# Altium PCB INDICATOR RIGHT.PcbDoc
Units mm, origin at the board's own origin, x right, y up, seen from the top; angles counter-clockwise.
Board outline 156.25 x 64.25 mm, 2 copper layers (Top Layer, Bottom Layer); 98 components, 86 nets, 236 pads, 12 vias.
Unrouted connection lines stored in the file: 26.
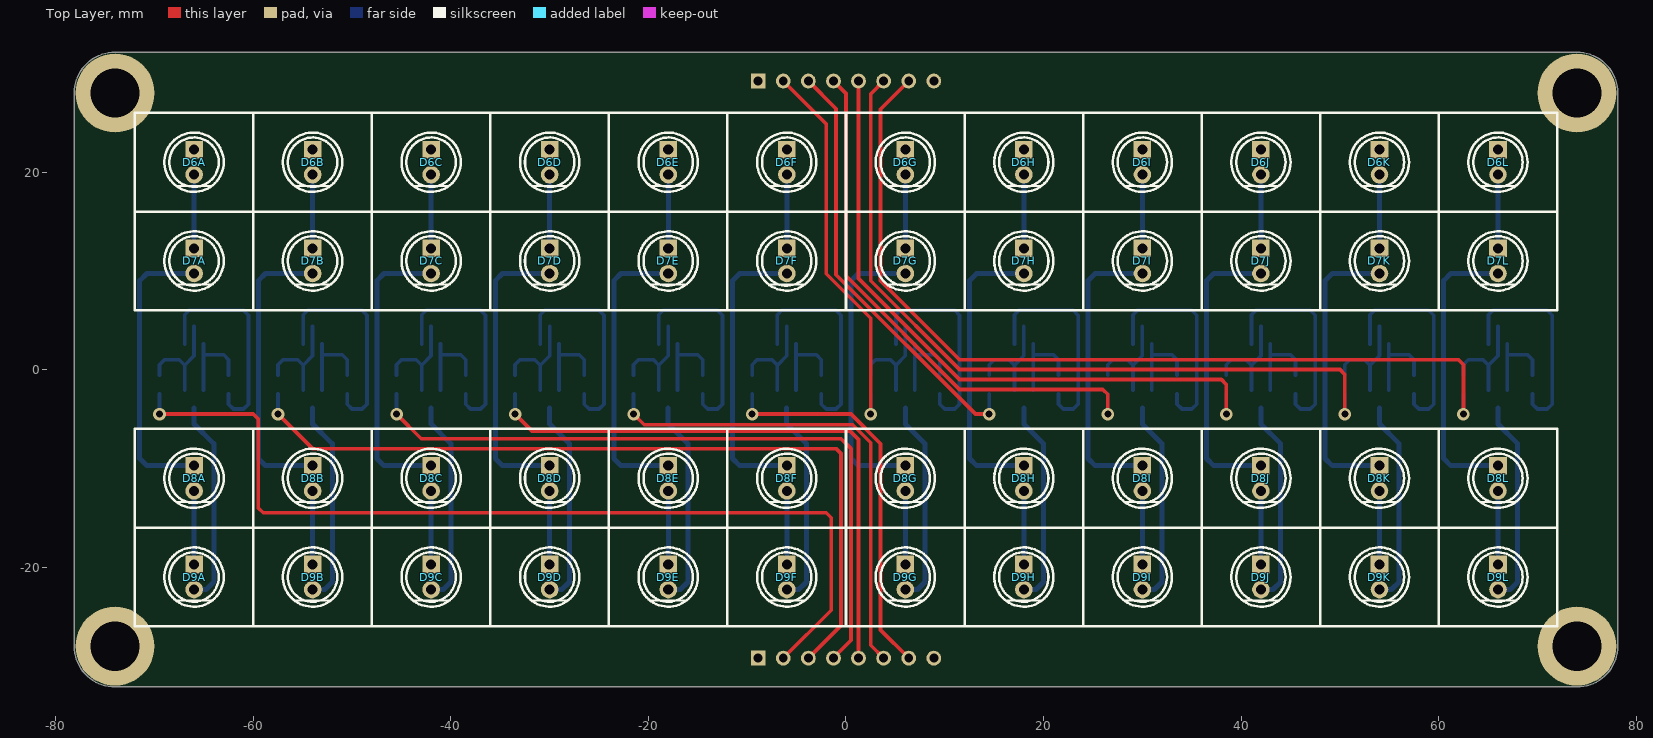
[diagram p0: Top Layer view]
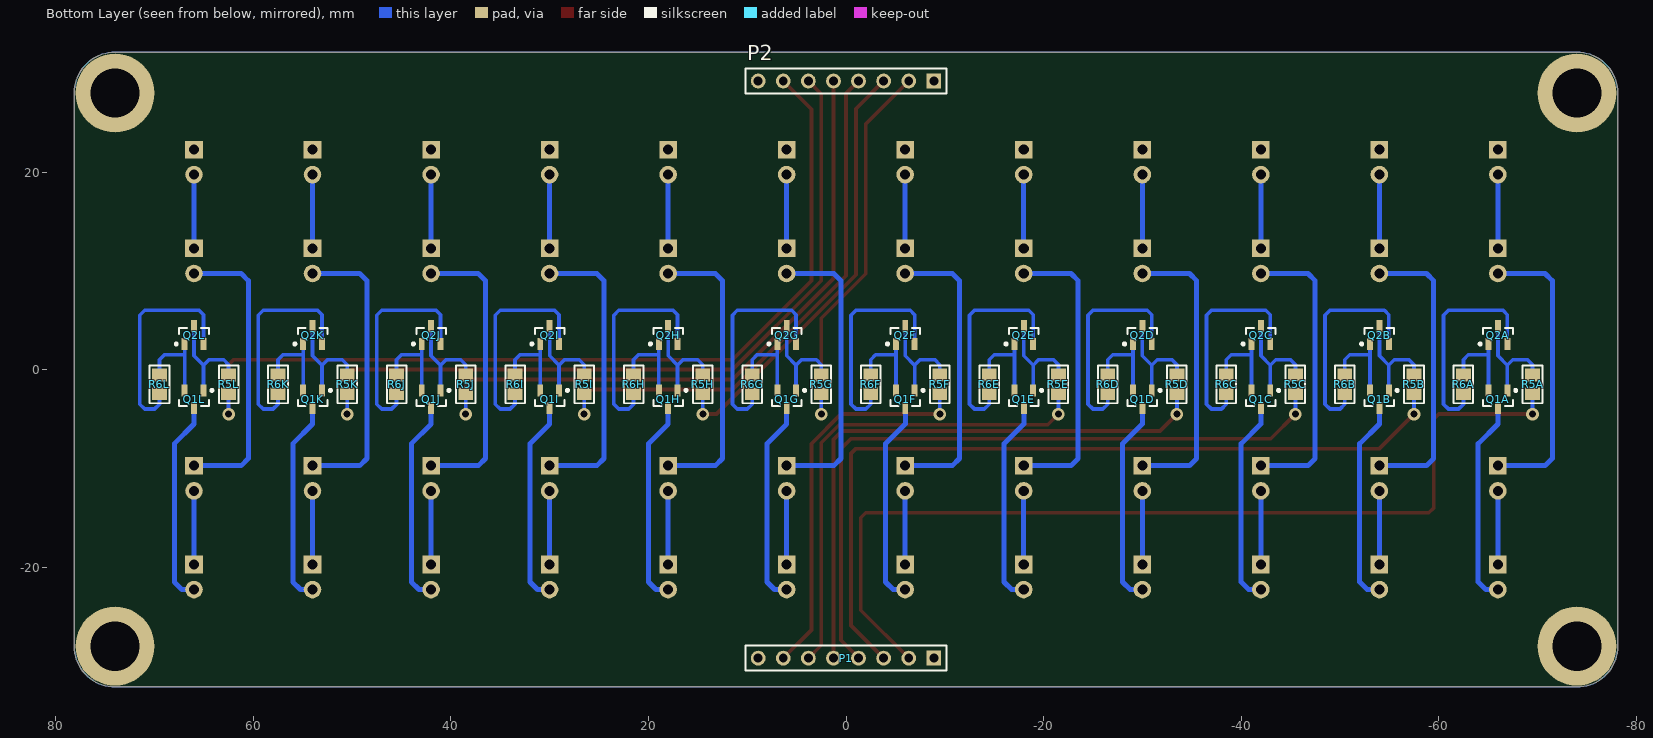
[diagram p1: Bottom Layer view, seen from below]
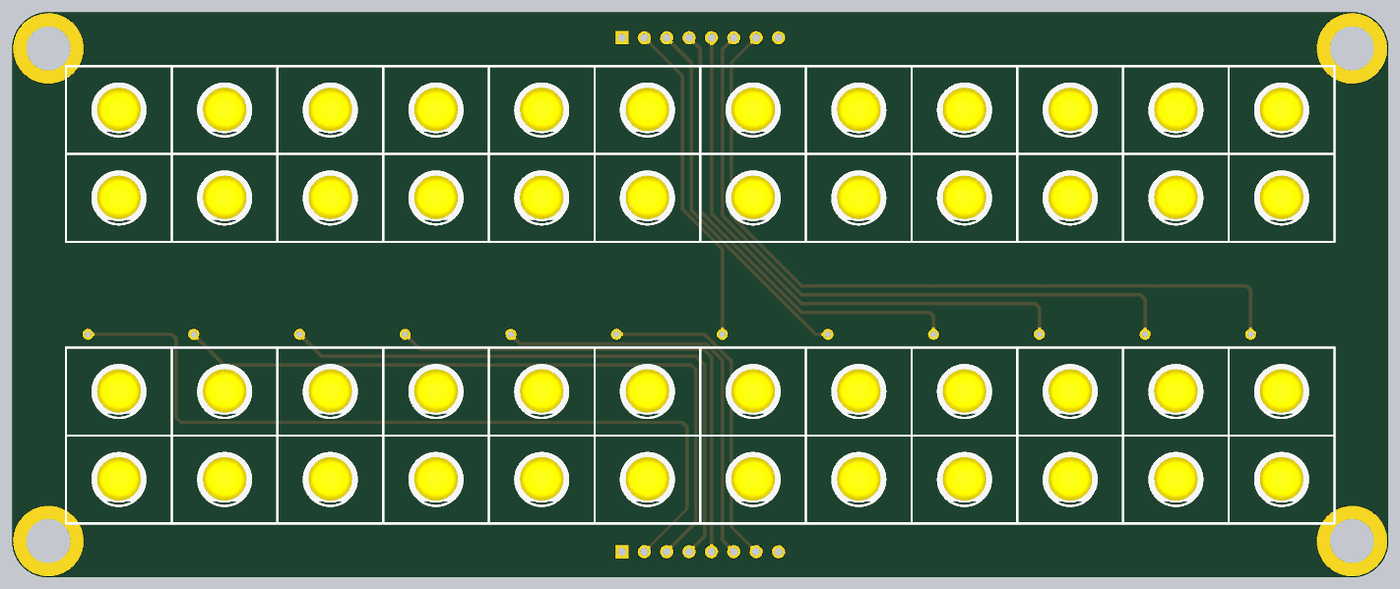
[diagram p2: 3D render of the assembled board from above, using the file's embedded part models]

## Layer stack, top to bottom
Top Layer: signal copper 0.0356
Dielectric: dielectric 0.32, FR-4, Dk 4.8
Bottom Layer: signal copper 0.0356

## Board outline
-78.127,-28 -78.127,28 cw(c-74,28) -74,32.127 74,32.127 cw(c74,28) 78.127,28 78.127,-28 cw(c74,-28) 74,-32.127 -74,-32.127 cw(c-74,-28)

## Design rules (kind name [scope] priority, off if disabled: settings)
Clearance [All] p1: gap=0.254
PolygonConnect [All] p1: connectstyle=Relief reliefconductorwidth=0.254 reliefentries=4 polygonreliefangle="90 Angle" airgapwidth=0.254
RoomDefinition INDICATOR [InComponentClass('INDICATOR')] p1: confinementstyle=ConfineIn formatcopy=TRUE lockcomponents=FALSE outline -78,-32 78,-32 78,32 -78,32
RoomDefinition U_LEDSANDDRIVER12 [InComponentClass('U_LEDSANDDRIVER12')] p2: confinementstyle=ConfineIn formatcopy=TRUE lockcomponents=FALSE outline 60,-26 72,-26 72,26 60,26
RoomDefinition U_LEDSANDDRIVER11 [InComponentClass('U_LEDSANDDRIVER11')] p3: confinementstyle=ConfineIn formatcopy=TRUE lockcomponents=FALSE outline 48,-26 60,-26 60,26 48,26
RoomDefinition U_LEDSANDDRIVER10 [InComponentClass('U_LEDSANDDRIVER10')] p4: confinementstyle=ConfineIn formatcopy=TRUE lockcomponents=FALSE outline 36,-26 48,-26 48,26 36,26
RoomDefinition U_LEDSANDDRIVER9 [InComponentClass('U_LEDSANDDRIVER9')] p5: confinementstyle=ConfineIn formatcopy=TRUE lockcomponents=FALSE outline 24,-26 36,-26 36,26 24,26
RoomDefinition U_LEDSANDDRIVER8 [InComponentClass('U_LEDSANDDRIVER8')] p6: confinementstyle=ConfineIn formatcopy=TRUE lockcomponents=FALSE outline 12,-26 24,-26 24,26 12,26
RoomDefinition U_LEDSANDDRIVER7 [InComponentClass('U_LEDSANDDRIVER7')] p7: confinementstyle=ConfineIn formatcopy=TRUE lockcomponents=FALSE outline 0,-26 12,-26 12,26 0,26
RoomDefinition U_LEDSANDDRIVER6 [InComponentClass('U_LEDSANDDRIVER6')] p8: confinementstyle=ConfineIn formatcopy=TRUE lockcomponents=FALSE outline -12,-26 0,-26 0,26 -12,26
RoomDefinition U_LEDSANDDRIVER5 [InComponentClass('U_LEDSANDDRIVER5')] p9: confinementstyle=ConfineIn formatcopy=TRUE lockcomponents=FALSE outline -24,-26 -12,-26 -12,26 -24,26
RoomDefinition U_LEDSANDDRIVER4 [InComponentClass('U_LEDSANDDRIVER4')] p10: confinementstyle=ConfineIn formatcopy=TRUE lockcomponents=FALSE outline -36,-26 -24,-26 -24,26 -36,26
RoomDefinition U_LEDSANDDRIVER3 [InComponentClass('U_LEDSANDDRIVER3')] p11: confinementstyle=ConfineIn formatcopy=TRUE lockcomponents=FALSE outline -48,-26 -36,-26 -36,26 -48,26
RoomDefinition U_LEDSANDDRIVER2 [InComponentClass('U_LEDSANDDRIVER2')] p12: confinementstyle=ConfineIn formatcopy=TRUE lockcomponents=FALSE outline -60,-26 -48,-26 -48,26 -60,26
RoomDefinition U_LEDSANDDRIVER1 [InComponentClass('U_LEDSANDDRIVER1')] p13: confinementstyle=ConfineIn formatcopy=TRUE lockcomponents=FALSE outline -72,-26 -60,-26 -60,26 -72,26
RoutingVias [All] p1: holewidth=0.8 width=1.6 viastyle="Through Hole" minholewidth=0.711 minwidth=1.27 maxholewidth=5 maxwidth=40
SolderMaskExpansion [All] p1: expansion=0.102
Width [All] p1: maxlimit=2.54 minlimit=0.254 preferedwidth=0.254
28 further rules are at their usual default settings.

## Classes and differential pairs
net class DRIVE[1..16]: DRIVE1 DRIVE2 DRIVE3 DRIVE4 DRIVE5 DRIVE6 DRIVE7 DRIVE8 DRIVE9 DRIVE10 DRIVE11 DRIVE12 DRIVE13 DRIVE14 DRIVE15 DRIVE16
channel class "LEDS AND DRIVER": U_LEDSANDDRIVER1 U_LEDSANDDRIVER2 U_LEDSANDDRIVER3 U_LEDSANDDRIVER4 U_LEDSANDDRIVER5 U_LEDSANDDRIVER6 U_LEDSANDDRIVER7 U_LEDSANDDRIVER8 U_LEDSANDDRIVER9 U_LEDSANDDRIVER10 U_LEDSANDDRIVER11 U_LEDSANDDRIVER12
component class U_LEDSANDDRIVER12: D6L D7L D8L D9L Q1L Q2L R5L R6L
component class U_LEDSANDDRIVER11: D6K D7K D8K D9K Q1K Q2K R5K R6K
component class U_LEDSANDDRIVER10: D6J D7J D8J D9J Q1J Q2J R5J R6J
component class U_LEDSANDDRIVER9: D6I D7I D8I D9I Q1I Q2I R5I R6I
component class U_LEDSANDDRIVER8: D6H D7H D8H D9H Q1H Q2H R5H R6H
component class U_LEDSANDDRIVER7: D6G D7G D8G D9G Q1G Q2G R5G R6G
component class U_LEDSANDDRIVER6: D6F D7F D8F D9F Q1F Q2F R5F R6F
component class U_LEDSANDDRIVER5: D6E D7E D8E D9E Q1E Q2E R5E R6E
component class U_LEDSANDDRIVER4: D6D D7D D8D D9D Q1D Q2D R5D R6D
component class U_LEDSANDDRIVER3: D6C D7C D8C D9C Q1C Q2C R5C R6C
component class U_LEDSANDDRIVER2: D6B D7B D8B D9B Q1B Q2B R5B R6B
component class U_LEDSANDDRIVER1: D6A D7A D8A D9A Q1A Q2A R5A R6A
component class INDICATOR: P1 P2

## Components (designator, comment, footprint, x,y, rotation, side; value= is the part's Value field where it differs from the comment)
D6A "Value" "LED(3D) 5MM VERTICAL (YELLOW)" -66,21 r90 top (schematic designator D6)
D6B "Value" "LED(3D) 5MM VERTICAL (YELLOW)" -54,21 r90 top (schematic designator D6)
D6C "Value" "LED(3D) 5MM VERTICAL (YELLOW)" -42,21 r90 top (schematic designator D6)
D6D "Value" "LED(3D) 5MM VERTICAL (YELLOW)" -30,21 r90 top (schematic designator D6)
D6E "Value" "LED(3D) 5MM VERTICAL (YELLOW)" -18,21 r90 top (schematic designator D6)
D6F "Value" "LED(3D) 5MM VERTICAL (YELLOW)" -6,21 r90 top (schematic designator D6)
D6G "Value" "LED(3D) 5MM VERTICAL (YELLOW)" 6,21 r90 top (schematic designator D6)
D6H "Value" "LED(3D) 5MM VERTICAL (YELLOW)" 18,21 r90 top (schematic designator D6)
D6I "Value" "LED(3D) 5MM VERTICAL (YELLOW)" 30,21 r90 top (schematic designator D6)
D6J "Value" "LED(3D) 5MM VERTICAL (YELLOW)" 42,21 r90 top (schematic designator D6)
D6K "Value" "LED(3D) 5MM VERTICAL (YELLOW)" 54,21 r90 top (schematic designator D6)
D6L "Value" "LED(3D) 5MM VERTICAL (YELLOW)" 66,21 r90 top (schematic designator D6)
D7A "Value" "LED(3D) 5MM VERTICAL (YELLOW)" -66,11 r90 top (schematic designator D7)
D7B "Value" "LED(3D) 5MM VERTICAL (YELLOW)" -54,11 r90 top (schematic designator D7)
D7C "Value" "LED(3D) 5MM VERTICAL (YELLOW)" -42,11 r90 top (schematic designator D7)
D7D "Value" "LED(3D) 5MM VERTICAL (YELLOW)" -30,11 r90 top (schematic designator D7)
D7E "Value" "LED(3D) 5MM VERTICAL (YELLOW)" -18,11 r90 top (schematic designator D7)
D7F "Value" "LED(3D) 5MM VERTICAL (YELLOW)" -6,11 r90 top (schematic designator D7)
D7G "Value" "LED(3D) 5MM VERTICAL (YELLOW)" 6,11 r90 top (schematic designator D7)
D7H "Value" "LED(3D) 5MM VERTICAL (YELLOW)" 18,11 r90 top (schematic designator D7)
D7I "Value" "LED(3D) 5MM VERTICAL (YELLOW)" 30,11 r90 top (schematic designator D7)
D7J "Value" "LED(3D) 5MM VERTICAL (YELLOW)" 42,11 r90 top (schematic designator D7)
D7K "Value" "LED(3D) 5MM VERTICAL (YELLOW)" 54,11 r90 top (schematic designator D7)
D7L "Value" "LED(3D) 5MM VERTICAL (YELLOW)" 66,11 r90 top (schematic designator D7)
D8A "Value" "LED(3D) 5MM VERTICAL (YELLOW)" -66,-11 r90 top (schematic designator D8)
D8B "Value" "LED(3D) 5MM VERTICAL (YELLOW)" -54,-11 r90 top (schematic designator D8)
D8C "Value" "LED(3D) 5MM VERTICAL (YELLOW)" -42,-11 r90 top (schematic designator D8)
D8D "Value" "LED(3D) 5MM VERTICAL (YELLOW)" -30,-11 r90 top (schematic designator D8)
D8E "Value" "LED(3D) 5MM VERTICAL (YELLOW)" -18,-11 r90 top (schematic designator D8)
D8F "Value" "LED(3D) 5MM VERTICAL (YELLOW)" -6,-11 r90 top (schematic designator D8)
D8G "Value" "LED(3D) 5MM VERTICAL (YELLOW)" 6,-11 r90 top (schematic designator D8)
D8H "Value" "LED(3D) 5MM VERTICAL (YELLOW)" 18,-11 r90 top (schematic designator D8)
D8I "Value" "LED(3D) 5MM VERTICAL (YELLOW)" 30,-11 r90 top (schematic designator D8)
D8J "Value" "LED(3D) 5MM VERTICAL (YELLOW)" 42,-11 r90 top (schematic designator D8)
D8K "Value" "LED(3D) 5MM VERTICAL (YELLOW)" 54,-11 r90 top (schematic designator D8)
D8L "Value" "LED(3D) 5MM VERTICAL (YELLOW)" 66,-11 r90 top (schematic designator D8)
D9A "Value" "LED(3D) 5MM VERTICAL (YELLOW)" -66,-21 r90 top (schematic designator D9)
D9B "Value" "LED(3D) 5MM VERTICAL (YELLOW)" -54,-21 r90 top (schematic designator D9)
D9C "Value" "LED(3D) 5MM VERTICAL (YELLOW)" -42,-21 r90 top (schematic designator D9)
D9D "Value" "LED(3D) 5MM VERTICAL (YELLOW)" -30,-21 r90 top (schematic designator D9)
D9E "Value" "LED(3D) 5MM VERTICAL (YELLOW)" -18,-21 r90 top (schematic designator D9)
D9F "Value" "LED(3D) 5MM VERTICAL (YELLOW)" -6,-21 r90 top (schematic designator D9)
D9G "Value" "LED(3D) 5MM VERTICAL (YELLOW)" 6,-21 r90 top (schematic designator D9)
D9H "Value" "LED(3D) 5MM VERTICAL (YELLOW)" 18,-21 r90 top (schematic designator D9)
D9I "Value" "LED(3D) 5MM VERTICAL (YELLOW)" 30,-21 r90 top (schematic designator D9)
D9J "Value" "LED(3D) 5MM VERTICAL (YELLOW)" 42,-21 r90 top (schematic designator D9)
D9K "Value" "LED(3D) 5MM VERTICAL (YELLOW)" 54,-21 r90 top (schematic designator D9)
D9L "Value" "LED(3D) 5MM VERTICAL (YELLOW)" 66,-21 r90 top (schematic designator D9)
P1 "Header 8" HDR1X8 -8.89,-29.21 r0 bottom
P2 "Header 8" HDR1X8 -8.89,29.21 r0 bottom
Q1A "BC817" SOT23-3L -66,-3 r270 bottom (schematic designator Q1)
Q1B "BC817" SOT23-3L -54,-3 r270 bottom (schematic designator Q1)
Q1C "BC817" SOT23-3L -42,-3 r270 bottom (schematic designator Q1)
Q1D "BC817" SOT23-3L -30,-3 r270 bottom (schematic designator Q1)
Q1E "BC817" SOT23-3L -18,-3 r270 bottom (schematic designator Q1)
Q1F "BC817" SOT23-3L -6,-3 r270 bottom (schematic designator Q1)
Q1G "BC817" SOT23-3L 6,-3 r270 bottom (schematic designator Q1)
Q1H "BC817" SOT23-3L 18,-3 r270 bottom (schematic designator Q1)
Q1I "BC817" SOT23-3L 30,-3 r270 bottom (schematic designator Q1)
Q1J "BC817" SOT23-3L 42,-3 r270 bottom (schematic designator Q1)
Q1K "BC817" SOT23-3L 54,-3 r270 bottom (schematic designator Q1)
Q1L "BC817" SOT23-3L 66,-3 r270 bottom (schematic designator Q1)
Q2A "BC817" SOT23-3L -66,3.5 r90 bottom (schematic designator Q2)
Q2B "BC817" SOT23-3L -54,3.5 r90 bottom (schematic designator Q2)
Q2C "BC817" SOT23-3L -42,3.5 r90 bottom (schematic designator Q2)
Q2D "BC817" SOT23-3L -30,3.5 r90 bottom (schematic designator Q2)
Q2E "BC817" SOT23-3L -18,3.5 r90 bottom (schematic designator Q2)
Q2F "BC817" SOT23-3L -6,3.5 r90 bottom (schematic designator Q2)
Q2G "BC817" SOT23-3L 6,3.5 r90 bottom (schematic designator Q2)
Q2H "BC817" SOT23-3L 18,3.5 r90 bottom (schematic designator Q2)
Q2I "BC817" SOT23-3L 30,3.5 r90 bottom (schematic designator Q2)
Q2J "BC817" SOT23-3L 42,3.5 r90 bottom (schematic designator Q2)
Q2K "BC817" SOT23-3L 54,3.5 r90 bottom (schematic designator Q2)
Q2L "BC817" SOT23-3L 66,3.5 r90 bottom (schematic designator Q2)
R5A "1k" "RES (3D) - 0805" -69.5,-1.5 r270 bottom (schematic designator R5)
R5B "1k" "RES (3D) - 0805" -57.5,-1.5 r270 bottom (schematic designator R5)
R5C "1k" "RES (3D) - 0805" -45.5,-1.5 r270 bottom (schematic designator R5)
R5D "1k" "RES (3D) - 0805" -33.5,-1.5 r270 bottom (schematic designator R5)
R5E "1k" "RES (3D) - 0805" -21.5,-1.5 r270 bottom (schematic designator R5)
R5F "1k" "RES (3D) - 0805" -9.5,-1.5 r270 bottom (schematic designator R5)
R5G "1k" "RES (3D) - 0805" 2.5,-1.5 r270 bottom (schematic designator R5)
R5H "1k" "RES (3D) - 0805" 14.5,-1.5 r270 bottom (schematic designator R5)
R5I "1k" "RES (3D) - 0805" 26.5,-1.5 r270 bottom (schematic designator R5)
R5J "1k" "RES (3D) - 0805" 38.5,-1.5 r270 bottom (schematic designator R5)
R5K "1k" "RES (3D) - 0805" 50.5,-1.5 r270 bottom (schematic designator R5)
R5L "1k" "RES (3D) - 0805" 62.5,-1.5 r270 bottom (schematic designator R5)
R6A "35R" "RES (3D) - 0805" -62.5,-1.5 r90 bottom (schematic designator R6)
R6B "35R" "RES (3D) - 0805" -50.5,-1.5 r90 bottom (schematic designator R6)
R6C "35R" "RES (3D) - 0805" -38.5,-1.5 r90 bottom (schematic designator R6)
R6D "35R" "RES (3D) - 0805" -26.5,-1.5 r90 bottom (schematic designator R6)
R6E "35R" "RES (3D) - 0805" -14.5,-1.5 r90 bottom (schematic designator R6)
R6F "35R" "RES (3D) - 0805" -2.5,-1.5 r90 bottom (schematic designator R6)
R6G "35R" "RES (3D) - 0805" 9.5,-1.5 r90 bottom (schematic designator R6)
R6H "35R" "RES (3D) - 0805" 21.5,-1.5 r90 bottom (schematic designator R6)
R6I "35R" "RES (3D) - 0805" 33.5,-1.5 r90 bottom (schematic designator R6)
R6J "35R" "RES (3D) - 0805" 45.5,-1.5 r90 bottom (schematic designator R6)
R6K "35R" "RES (3D) - 0805" 57.5,-1.5 r90 bottom (schematic designator R6)
R6L "35R" "RES (3D) - 0805" 69.5,-1.5 r90 bottom (schematic designator R6)

## Footprints (in the part's own frame and the unit in brackets; to place one, negate y for a bottom-side part, rotate by r counter-clockwise, add the part's x,y. Pads: shape width x height; smd on the part's side, far side on the other; paste and mask are expansions set on the pad)
HDR1X8 [mm] "Connector; Header; 8 Position"
  rect 1.5x1.5 hole 0.9: 1(0,0)
  round 1.5 hole 0.9: 2(2.54,0) 3(5.08,0) 4(7.62,0) 5(10.16,0) 6(12.7,0) 7(15.24,0) 8(17.78,0)
  silkscreen extent -1.27,-1.27 19.05,1.27
"LED(3D) 5MM VERTICAL (YELLOW)" [mil]
  rect 70x70 hole 40: 1(50.06,-0.28)
  round 70 hole 40: 2(-49.94,-0.28)
  silkscreen extent -95,-118 118,118, body extent -96,-119 117,118, height 485
"RES (3D) - 0805" [mm]
  rect 1.3x1.5 smd: 1(-0.95,0) 2(0.95,0)
  silkscreen extent -1.91,-0.99 1.91,0.99, body extent -1,-0.63 1,0.63, height 1
SOT23-3L [mm] "SOT23, 3-Leads, Body 2.9x1.3mm, Pitch 0.95mm, Lead Span 2.5mm, IPC High Density"
  rect 1.2x0.6 smd: 1(-0.9,0.95) 2(-0.9,-0.95) 3(0.9,0)
  silkscreen extent -1.02,-1.5 0.7,1.92, body extent -1.25,-1.5 1.25,1.5, height 1.12

## Part data
D6A D6B D6C D6D D6E D6F D6G D6H D6I D6J D6K D6L D7A D7B D7C D7D D7E D7F D7G D7H D7I D7J D7K D7L D8A D8B D8C D8D D8E D8F D8G D8H D8I D8J D8K D8L D9A D9B D9C D9D D9E D9F D9G D9H D9I D9J D9K D9L: library part "LED 3mm RED", "LED 55"
P1 P2: "Header, 8-Pin"
Q1A Q1B Q1C Q1D Q1E Q1F Q1G Q1H Q1I Q1J Q1K Q1L Q2A Q2B Q2C Q2D Q2E Q2F Q2G Q2H Q2I Q2J Q2K Q2L: "NPN Bipolar Transistor"
R5A R5B R5C R5D R5E R5F R5G R5H R5I R5J R5K R5L R6A R6B R6C R6D R6E R6F R6G R6H R6I R6J R6K R6L: library part "RES SMD 0603 1k", "RESISTOR SMD 0603 1k"

## Free pads (board coordinates)
  round 8 hole 5: 0(-74,-28) 0(-74,28) 0(74,-28) 0(74,28)

## Via types
v1: diameter 1.27, hole 0.711, Top Layer to Bottom Layer, 12 vias

## Nets (pads, with @x,y where several pads share a name; then routed paths per layer and width w, separated by ;. In a path a pad name is that pad's centre, name@x,y a point inside that pad or via, vN(x,y) a via of type N, cw(c..) or ccw(c..) an arc to the next point about the centre after c; other vN are vias at no path point)
DRIVE1: P1.2 R5A.2 | length 95.9
  Top Layer w0.381: v1(-69.5,-4.5) -60,-4.5 -59.5,-5 -59.5,-14 -59,-14.5 -2,-14.5 -1.5,-15 -1.5,-24.36 P1.2
  Bottom Layer w0.381: v1(-69.5,-4.5) R5A.2
DRIVE2: P1.3 R5B.2 | length 82.8
  Top Layer w0.381: v1(-57.5,-4.5) -54,-8 -1,-8 -0.5,-8.5 -0.5,-25.9 P1.3
  Bottom Layer w0.381: v1(-57.5,-4.5) R5B.2
DRIVE3: P1.4 R5C.2 | length 71.4
  Top Layer w0.381: v1(-45.5,-4.5) -43,-7 -0.5,-7 0.5,-8 0.5,-27.4 -1.27,-29.17 P1.4
  Bottom Layer w0.381: v1(-45.5,-4.5) R5C.2
DRIVE4: P1.5 R5D.2 | length 60
  Top Layer w0.381: v1(-33.5,-4.5) -31.786,-6.215 0.415,-6.215 1.27,-7.07 P1.5
  Bottom Layer w0.381: v1(-33.5,-4.5) R5D.2
DRIVE5: P1.6 R5E.2 | length 49.6
  Top Layer w0.381: v1(-21.5,-4.5) -20.421,-5.58 0.681,-5.58 2.5,-7.398 2.5,-27.9 P1.6
  Bottom Layer w0.381: v1(-21.5,-4.5) R5E.2
DRIVE6: P1.7 R5F.2 | length 39.2
  Top Layer w0.381: v1(-9.5,-4.5) 0.5,-4.5 3.5,-7.5 3.5,-26.36 P1.7
  Bottom Layer w0.381: v1(-9.5,-4.5) R5F.2
DRIVE7: P2.2 R5G.2 | length 39.4
  Top Layer w0.381: P2.2 -2,24.86 -2,9.704 2.5,5.204 v1(2.5,-4.5)
  Bottom Layer w0.381: v1(2.5,-4.5) R5G.2
DRIVE8: P2.3 R5H.2 | length 44.2
  Top Layer w0.381: P2.3 -1,26.4 -1,9.602 13.102,-4.5 v1(14.5,-4.5)
  Bottom Layer w0.381: v1(14.5,-4.5) R5H.2
DRIVE9: P2.4 R5I.2 | length 55.8
  Top Layer w0.381: P2.4 0,27.94 0,9.5 11.5,-2 26,-2 26.5,-2.5 v1(26.5,-4.5)
  Bottom Layer w0.381: v1(26.5,-4.5) R5I.2
DRIVE10: P2.5 R5J.2 | length 66.7
  Top Layer w0.381: P2.5 1.27,9.23 11.5,-1 38,-1 38.5,-1.5 v1(38.5,-4.5)
  Bottom Layer w0.381: v1(38.5,-4.5) R5J.2
DRIVE11: P2.6 R5K.2 | length 78.7
  Top Layer w0.381: P2.6 2.5,27.9 2.5,9 11.5,0 50,0 50.5,-0.5 v1(50.5,-4.5)
  Bottom Layer w0.381: v1(50.5,-4.5) R5K.2
DRIVE12: P2.7 R5L.2 | length 91
  Top Layer w0.381: P2.7 3.5,26.36 3.5,9 11.5,1 62,1 62.5,0.5 v1(62.5,-4.5)
  Bottom Layer w0.381: v1(62.5,-4.5) R5L.2
GND: P1.8 P2.8 Q2A.2 Q2B.2 Q2C.2 Q2D.2 Q2E.2 Q2F.2 Q2G.2 Q2H.2 Q2I.2 Q2J.2 Q2K.2 Q2L.2 R6A.1 R6B.1 R6C.1 R6D.1 R6E.1 R6F.1 R6G.1 R6H.1 R6I.1 R6J.1 R6K.1 R6L.1 | length 267.1
  Bottom Layer w0.381: Q2A.2 -66.95,5.55 -66.5,6 -61,6 -60.5,5.5 -60.5,-3.5 -61,-4 -62,-4 -62.5,-3.5 R6A.1 ; Q2B.2 -54.95,5.55 -54.5,6 -49,6 -48.5,5.5 -48.5,-3.5 -49,-4 -50,-4 -50.5,-3.5 R6B.1 ; Q2C.2 -42.95,5.55 -42.5,6 -37,6 -36.5,5.5 -36.5,-3.5 -37,-4 -38,-4 -38.5,-3.5 R6C.1 ; Q2D.2 -30.95,5.55 -30.5,6 -25,6 -24.5,5.5 -24.5,-3.5 -25,-4 -26,-4 -26.5,-3.5 R6D.1 ; Q2E.2 -18.95,5.55 -18.5,6 -13,6 -12.5,5.5 -12.5,-3.5 -13,-4 -14,-4 -14.5,-3.5 R6E.1 ; Q2F.2 -6.95,5.55 -6.5,6 -1,6 -0.5,5.5 -0.5,-3.5 -1,-4 -2,-4 -2.5,-3.5 R6F.1 ; Q2G.2 5.05,5.55 5.5,6 11,6 11.5,5.5 11.5,-3.5 11,-4 10,-4 9.5,-3.5 R6G.1 ; Q2H.2 17.05,5.55 17.5,6 23,6 23.5,5.5 23.5,-3.5 23,-4 22,-4 21.5,-3.5 R6H.1 ; Q2I.2 29.05,5.55 29.5,6 35,6 35.5,5.5 35.5,-3.5 35,-4 34,-4 33.5,-3.5 R6I.1 ; Q2J.2 41.05,5.55 41.5,6 47,6 47.5,5.5 47.5,-3.5 47,-4 46,-4 45.5,-3.5 R6J.1 ; Q2K.2 53.05,5.55 53.5,6 59,6 59.5,5.5 59.5,-3.5 59,-4 58,-4 57.5,-3.5 R6K.1 ; Q2L.2 65.05,5.55 65.5,6 71,6 71.5,5.5 71.5,-3.5 71,-4 70,-4 69.5,-3.5 R6L.1
NetD6A_2: D6A.2 D7A.1 | length 7.5
  Bottom Layer w0.508: D7A.1 D6A.2
NetD6B_2: D6B.2 D7B.1 | length 7.5
  Bottom Layer w0.508: D7B.1 D6B.2
NetD6C_2: D6C.2 D7C.1 | length 7.5
  Bottom Layer w0.508: D7C.1 D6C.2
NetD6D_2: D6D.2 D7D.1 | length 7.5
  Bottom Layer w0.508: D7D.1 D6D.2
NetD6E_2: D6E.2 D7E.1 | length 7.5
  Bottom Layer w0.508: D7E.1 D6E.2
NetD6F_2: D6F.2 D7F.1 | length 7.5
  Bottom Layer w0.508: D7F.1 D6F.2
NetD6G_2: D6G.2 D7G.1 | length 7.5
  Bottom Layer w0.508: D7G.1 D6G.2
NetD6H_2: D6H.2 D7H.1 | length 7.5
  Bottom Layer w0.508: D7H.1 D6H.2
NetD6I_2: D6I.2 D7I.1 | length 7.5
  Bottom Layer w0.508: D7I.1 D6I.2
NetD6J_2: D6J.2 D7J.1 | length 7.5
  Bottom Layer w0.508: D7J.1 D6J.2
NetD6K_2: D6K.2 D7K.1 | length 7.5
  Bottom Layer w0.508: D7K.1 D6K.2
NetD6L_2: D6L.2 D7L.1 | length 7.5
  Bottom Layer w0.508: D7L.1 D6L.2
NetD7A_2: D7A.2 D8A.1 | length 29.6
  Bottom Layer w0.508: D8A.1 -70.772,-9.728 -71.5,-9 -71.5,9 -70.768,9.732 D7A.2
NetD7B_2: D7B.2 D8B.1 | length 29.6
  Bottom Layer w0.508: D8B.1 -58.772,-9.728 -59.5,-9 -59.5,9 -58.768,9.732 D7B.2
NetD7C_2: D7C.2 D8C.1 | length 29.6
  Bottom Layer w0.508: D8C.1 -46.772,-9.728 -47.5,-9 -47.5,9 -46.768,9.732 D7C.2
NetD7D_2: D7D.2 D8D.1 | length 29.6
  Bottom Layer w0.508: D8D.1 -34.772,-9.728 -35.5,-9 -35.5,9 -34.768,9.732 D7D.2
NetD7E_2: D7E.2 D8E.1 | length 29.6
  Bottom Layer w0.508: D8E.1 -22.772,-9.728 -23.5,-9 -23.5,9 -22.768,9.732 D7E.2
NetD7F_2: D7F.2 D8F.1 | length 29.6
  Bottom Layer w0.508: D8F.1 -10.772,-9.728 -11.5,-9 -11.5,9 -10.768,9.732 D7F.2
NetD7G_2: D7G.2 D8G.1 | length 29.6
  Bottom Layer w0.508: D8G.1 1.228,-9.728 0.5,-9 0.5,9 1.232,9.732 D7G.2
NetD7H_2: D7H.2 D8H.1 | length 29.6
  Bottom Layer w0.508: D8H.1 13.228,-9.728 12.5,-9 12.5,9 13.232,9.732 D7H.2
NetD7I_2: D7I.2 D8I.1 | length 29.6
  Bottom Layer w0.508: D8I.1 25.228,-9.728 24.5,-9 24.5,9 25.232,9.732 D7I.2
NetD7J_2: D7J.2 D8J.1 | length 29.6
  Bottom Layer w0.508: D8J.1 37.228,-9.728 36.5,-9 36.5,9 37.232,9.732 D7J.2
NetD7K_2: D7K.2 D8K.1 | length 29.6
  Bottom Layer w0.508: D8K.1 49.228,-9.728 48.5,-9 48.5,9 49.232,9.732 D7K.2
NetD7L_2: D7L.2 D8L.1 | length 29.6
  Bottom Layer w0.508: D8L.1 61.228,-9.728 60.5,-9 60.5,9 61.232,9.732 D7L.2
NetD8A_2: D8A.2 D9A.1 | length 7.5
  Bottom Layer w0.508: D9A.1 D8A.2
NetD8B_2: D8B.2 D9B.1 | length 7.5
  Bottom Layer w0.508: D9B.1 D8B.2
NetD8C_2: D8C.2 D9C.1 | length 7.5
  Bottom Layer w0.508: D9C.1 D8C.2
NetD8D_2: D8D.2 D9D.1 | length 7.5
  Bottom Layer w0.508: D9D.1 D8D.2
NetD8E_2: D8E.2 D9E.1 | length 7.5
  Bottom Layer w0.508: D9E.1 D8E.2
NetD8F_2: D8F.2 D9F.1 | length 7.5
  Bottom Layer w0.508: D9F.1 D8F.2
NetD8G_2: D8G.2 D9G.1 | length 7.5
  Bottom Layer w0.508: D9G.1 D8G.2
NetD8H_2: D8H.2 D9H.1 | length 7.5
  Bottom Layer w0.508: D9H.1 D8H.2
NetD8I_2: D8I.2 D9I.1 | length 7.5
  Bottom Layer w0.508: D9I.1 D8I.2
NetD8J_2: D8J.2 D9J.1 | length 7.5
  Bottom Layer w0.508: D9J.1 D8J.2
NetD8K_2: D8K.2 D9K.1 | length 7.5
  Bottom Layer w0.508: D9K.1 D8K.2
NetD8L_2: D8L.2 D9L.1 | length 7.5
  Bottom Layer w0.508: D9L.1 D8L.2
NetD9A_2: D9A.2 Q1A.3 | length 20.7
  Bottom Layer w0.508: Q1A.3 -66,-5.5 -64,-7.5 -64,-21.5 -64.768,-22.268 D9A.2
NetD9B_2: D9B.2 Q1B.3 | length 20.7
  Bottom Layer w0.508: Q1B.3 -54,-5.5 -52,-7.5 -52,-21.5 -52.768,-22.268 D9B.2
NetD9C_2: D9C.2 Q1C.3 | length 20.7
  Bottom Layer w0.508: Q1C.3 -42,-5.5 -40,-7.5 -40,-21.5 -40.768,-22.268 D9C.2
NetD9D_2: D9D.2 Q1D.3 | length 20.7
  Bottom Layer w0.508: Q1D.3 -30,-5.5 -28,-7.5 -28,-21.5 -28.768,-22.268 D9D.2
NetD9E_2: D9E.2 Q1E.3 | length 20.7
  Bottom Layer w0.508: Q1E.3 -18,-5.5 -16,-7.5 -16,-21.5 -16.768,-22.268 D9E.2
NetD9F_2: D9F.2 Q1F.3 | length 20.7
  Bottom Layer w0.508: Q1F.3 -6,-5.5 -4,-7.5 -4,-21.5 -4.768,-22.268 D9F.2
NetD9G_2: D9G.2 Q1G.3 | length 20.7
  Bottom Layer w0.508: Q1G.3 6,-5.5 8,-7.5 8,-21.5 7.232,-22.268 D9G.2
NetD9H_2: D9H.2 Q1H.3 | length 20.7
  Bottom Layer w0.508: Q1H.3 18,-5.5 20,-7.5 20,-21.5 19.232,-22.268 D9H.2
NetD9I_2: D9I.2 Q1I.3 | length 20.7
  Bottom Layer w0.508: Q1I.3 30,-5.5 32,-7.5 32,-21.5 31.232,-22.268 D9I.2
NetD9J_2: D9J.2 Q1J.3 | length 20.7
  Bottom Layer w0.508: Q1J.3 42,-5.5 44,-7.5 44,-21.5 43.232,-22.268 D9J.2
NetD9K_2: D9K.2 Q1K.3 | length 20.7
  Bottom Layer w0.508: Q1K.3 54,-5.5 56,-7.5 56,-21.5 55.232,-22.268 D9K.2
NetD9L_2: D9L.2 Q1L.3 | length 20.7
  Bottom Layer w0.508: Q1L.3 66,-5.5 68,-7.5 68,-21.5 67.232,-22.268 D9L.2
NetQ1A_1: Q1A.1 Q2A.3 R5A.1 | length 10.9
  Bottom Layer w0.381: R5A.1 -69.5,0.5 -69,1 -67.5,1 -66.95,0.45 ; Q1A.1 -66.95,0.45 ; Q2A.3 -66,1.4 -66.95,0.45
NetQ1A_2: Q1A.2 Q2A.1 R6A.2 | length 9
  Bottom Layer w0.381: Q1A.2 -65.05,1.5 ; Q2A.1 -65.05,1.5 ; R6A.2 -62.5,1 -63,1.5 -65.05,1.5
NetQ1B_1: Q1B.1 Q2B.3 R5B.1 | length 10.9
  Bottom Layer w0.381: R5B.1 -57.5,0.5 -57,1 -55.5,1 -54.95,0.45 ; Q1B.1 -54.95,0.45 ; Q2B.3 -54,1.4 -54.95,0.45
NetQ1B_2: Q1B.2 Q2B.1 R6B.2 | length 9
  Bottom Layer w0.381: Q1B.2 -53.05,1.5 ; Q2B.1 -53.05,1.5 ; R6B.2 -50.5,1 -51,1.5 -53.05,1.5
NetQ1C_1: Q1C.1 Q2C.3 R5C.1 | length 10.9
  Bottom Layer w0.381: R5C.1 -45.5,0.5 -45,1 -43.5,1 -42.95,0.45 ; Q1C.1 -42.95,0.45 ; Q2C.3 -42,1.4 -42.95,0.45
NetQ1C_2: Q1C.2 Q2C.1 R6C.2 | length 9
  Bottom Layer w0.381: Q1C.2 -41.05,1.5 ; Q2C.1 -41.05,1.5 ; R6C.2 -38.5,1 -39,1.5 -41.05,1.5
NetQ1D_1: Q1D.1 Q2D.3 R5D.1 | length 10.9
  Bottom Layer w0.381: R5D.1 -33.5,0.5 -33,1 -31.5,1 -30.95,0.45 ; Q1D.1 -30.95,0.45 ; Q2D.3 -30,1.4 -30.95,0.45
NetQ1D_2: Q1D.2 Q2D.1 R6D.2 | length 9
  Bottom Layer w0.381: Q1D.2 -29.05,1.5 ; Q2D.1 -29.05,1.5 ; R6D.2 -26.5,1 -27,1.5 -29.05,1.5
NetQ1E_1: Q1E.1 Q2E.3 R5E.1 | length 10.9
  Bottom Layer w0.381: R5E.1 -21.5,0.5 -21,1 -19.5,1 -18.95,0.45 ; Q1E.1 -18.95,0.45 ; Q2E.3 -18,1.4 -18.95,0.45
NetQ1E_2: Q1E.2 Q2E.1 R6E.2 | length 9
  Bottom Layer w0.381: Q1E.2 -17.05,1.5 ; Q2E.1 -17.05,1.5 ; R6E.2 -14.5,1 -15,1.5 -17.05,1.5
NetQ1F_1: Q1F.1 Q2F.3 R5F.1 | length 10.9
  Bottom Layer w0.381: R5F.1 -9.5,0.5 -9,1 -7.5,1 -6.95,0.45 ; Q1F.1 -6.95,0.45 ; Q2F.3 -6,1.4 -6.95,0.45
NetQ1F_2: Q1F.2 Q2F.1 R6F.2 | length 9
  Bottom Layer w0.381: Q1F.2 -5.05,1.5 ; Q2F.1 -5.05,1.5 ; R6F.2 -2.5,1 -3,1.5 -5.05,1.5
NetQ1G_1: Q1G.1 Q2G.3 R5G.1 | length 10.9
  Bottom Layer w0.381: R5G.1 2.5,0.5 3,1 4.5,1 5.05,0.45 ; Q1G.1 5.05,0.45 ; Q2G.3 6,1.4 5.05,0.45
NetQ1G_2: Q1G.2 Q2G.1 R6G.2 | length 9
  Bottom Layer w0.381: Q1G.2 6.95,1.5 ; Q2G.1 6.95,1.5 ; R6G.2 9.5,1 9,1.5 6.95,1.5
NetQ1H_1: Q1H.1 Q2H.3 R5H.1 | length 10.9
  Bottom Layer w0.381: R5H.1 14.5,0.5 15,1 16.5,1 17.05,0.45 ; Q1H.1 17.05,0.45 ; Q2H.3 18,1.4 17.05,0.45
NetQ1H_2: Q1H.2 Q2H.1 R6H.2 | length 9
  Bottom Layer w0.381: Q1H.2 18.95,1.5 ; Q2H.1 18.95,1.5 ; R6H.2 21.5,1 21,1.5 18.95,1.5
NetQ1I_1: Q1I.1 Q2I.3 R5I.1 | length 10.9
  Bottom Layer w0.381: R5I.1 26.5,0.5 27,1 28.5,1 29.05,0.45 ; Q1I.1 29.05,0.45 ; Q2I.3 30,1.4 29.05,0.45
NetQ1I_2: Q1I.2 Q2I.1 R6I.2 | length 9
  Bottom Layer w0.381: Q1I.2 30.95,1.5 ; Q2I.1 30.95,1.5 ; R6I.2 33.5,1 33,1.5 30.95,1.5
NetQ1J_1: Q1J.1 Q2J.3 R5J.1 | length 10.9
  Bottom Layer w0.381: R5J.1 38.5,0.5 39,1 40.5,1 41.05,0.45 ; Q1J.1 41.05,0.45 ; Q2J.3 42,1.4 41.05,0.45
NetQ1J_2: Q1J.2 Q2J.1 R6J.2 | length 9
  Bottom Layer w0.381: Q1J.2 42.95,1.5 ; Q2J.1 42.95,1.5 ; R6J.2 45.5,1 45,1.5 42.95,1.5
NetQ1K_1: Q1K.1 Q2K.3 R5K.1 | length 10.9
  Bottom Layer w0.381: R5K.1 50.5,0.5 51,1 52.5,1 53.05,0.45 ; Q1K.1 53.05,0.45 ; Q2K.3 54,1.4 53.05,0.45
NetQ1K_2: Q1K.2 Q2K.1 R6K.2 | length 9
  Bottom Layer w0.381: Q1K.2 54.95,1.5 ; Q2K.1 54.95,1.5 ; R6K.2 57.5,1 57,1.5 54.95,1.5
NetQ1L_1: Q1L.1 Q2L.3 R5L.1 | length 10.9
  Bottom Layer w0.381: R5L.1 62.5,0.5 63,1 64.5,1 65.05,0.45 ; Q1L.1 65.05,0.45 ; Q2L.3 66,1.4 65.05,0.45
NetQ1L_2: Q1L.2 Q2L.1 R6L.2 | length 9
  Bottom Layer w0.381: Q1L.2 66.95,1.5 ; Q2L.1 66.95,1.5 ; R6L.2 69.5,1 69,1.5 66.95,1.5
V+: D6A.1 D6B.1 D6C.1 D6D.1 D6E.1 D6F.1 D6G.1 D6H.1 D6I.1 D6J.1 D6K.1 D6L.1 P1.1 P2.1

## Polygon pours and split planes (outlines as drawn)
GND on Bottom Layer "Bottom Layer-No Net" (solid, shelved, pour order 2): -78.127,-28 -78.127,28 cw(c-74,28) -74,32.127 74,32.127 cw(c74,28) 78.127,28 78.127,-28 cw(c74,-28) 74,-32.127 -74,-32.127 cw(c-74,-28)

## Silkscreen, mask and mechanical layers (free items; w line width, h text height)
Top Overlay:
  drawing of 182 lines, arcs and shapes, not listed
Mechanical 1:
  lines w0.254: -78,1 -78,28 cw(c-74,28) -74,32 0,32 74,32 cw(c74,28) 78,28 78,1 ; -78,4 -78,-28 ccw(c-74,-28) -74,-32 0,-32 74,-32 ccw(c74,-28) 78,-28 78,4